# Altium PCB PCB2.PcbDoc
Units mil, origin at the board's own origin, x right, y up, seen from the top; angles counter-clockwise.
Board outline 6000 x 4000 mil, 2 copper layers (Top Layer, Bottom Layer); 13 components, 33 nets, 92 pads, 0 vias.
Unrouted connection lines stored in the file: 39.
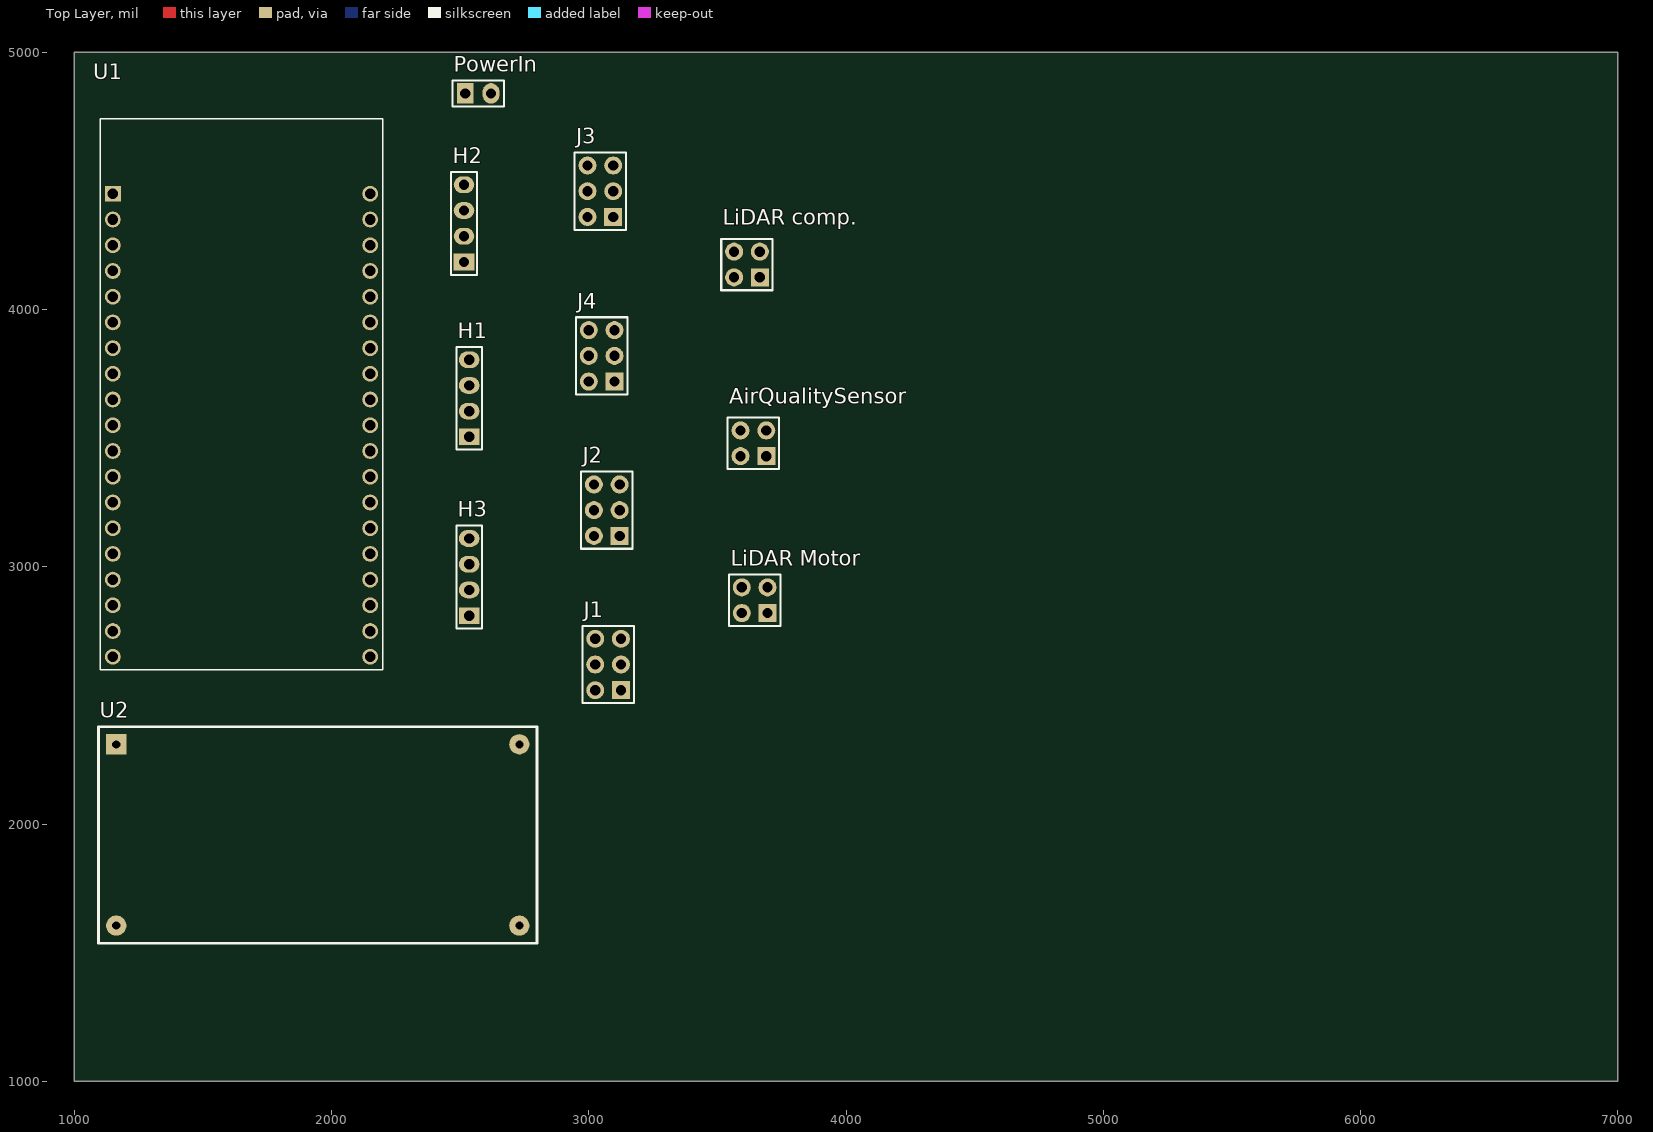
[diagram p0: Top Layer view]
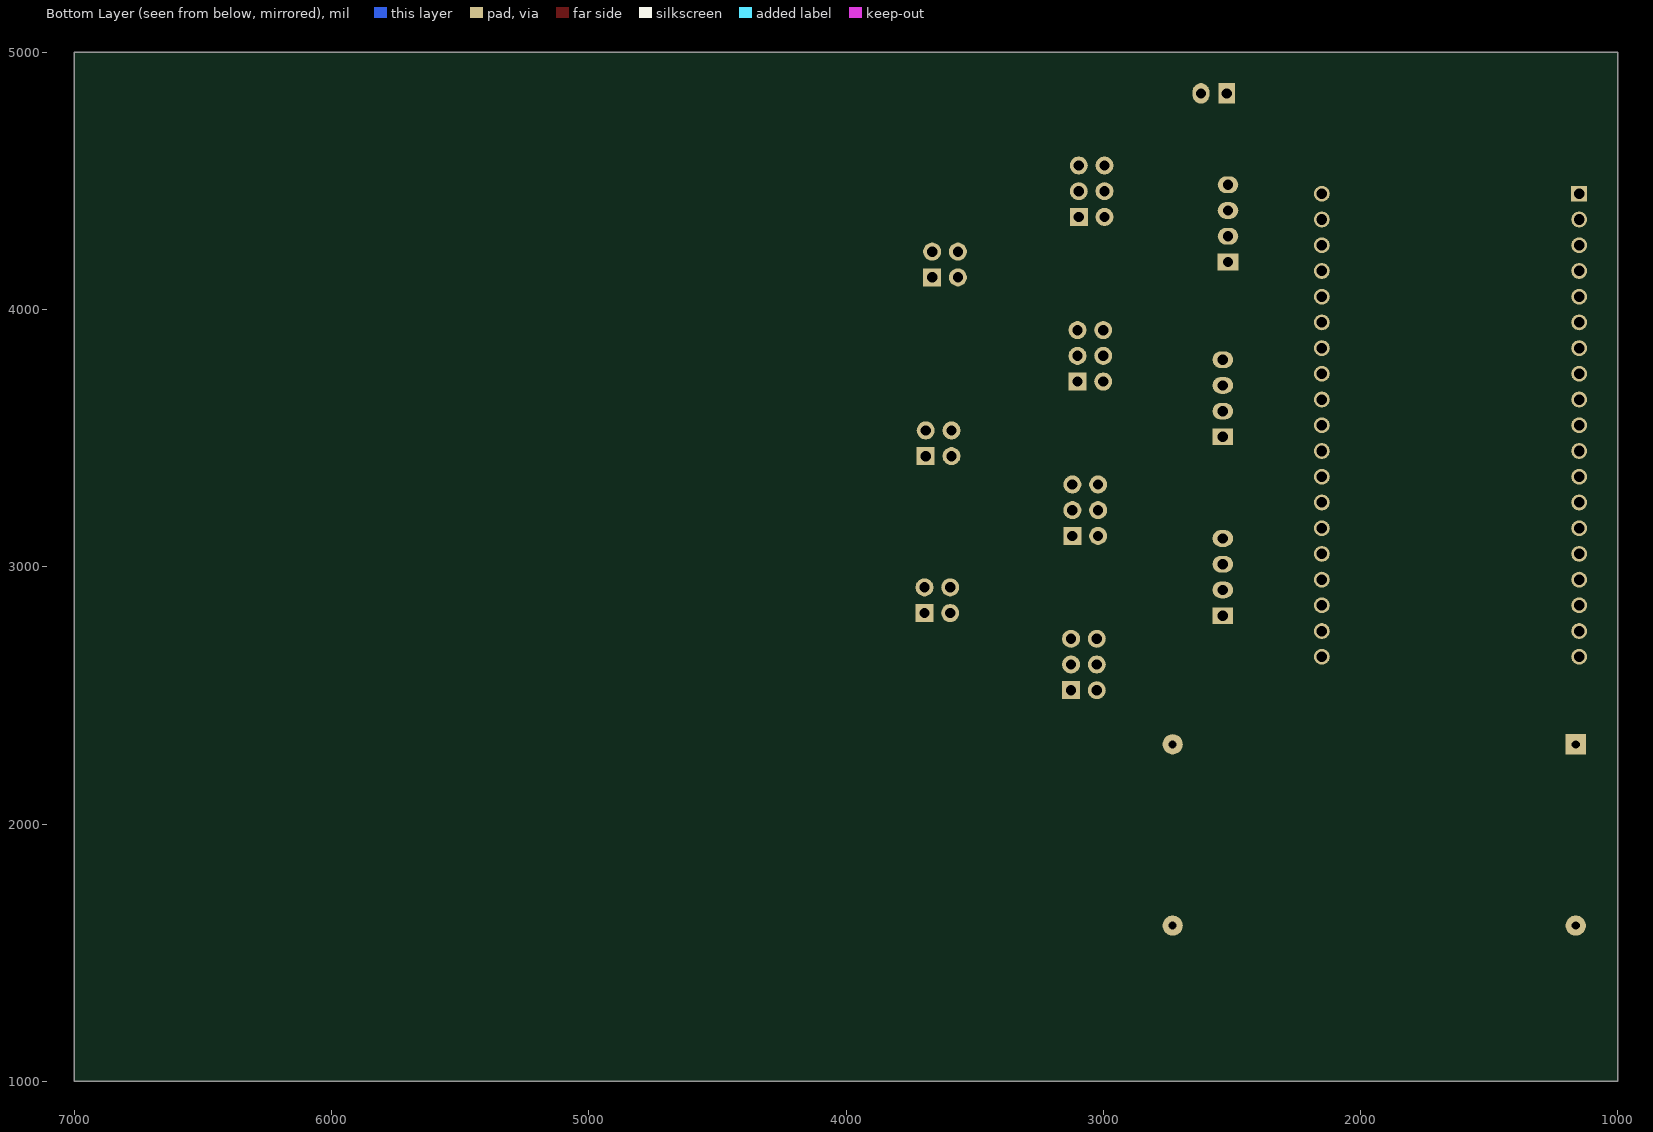
[diagram p1: Bottom Layer view, seen from below]

## Layer stack, top to bottom
Top Solder: solder mask 0.4, Solder Resist, Dk 3.5
Top Layer: signal copper 1.4
Dielectric 1: dielectric 12.6, FR-4, Dk 4.8
Bottom Layer: signal copper 1.4
Bottom Solder: solder mask 0.4, Solder Resist, Dk 3.5

## Board outline
1000,1000 7000,1000 7000,5000 1000,5000

## Design rules (kind name [scope] priority, off if disabled: settings)
Clearance [All] p1: gap=20 ignorepadtopadclearanceinfootprint=FALSE
PolygonConnect [All] p1: connectstyle=Relief reliefconductorwidth=10 reliefentries=4 polygonreliefangle="90 Angle" airgapwidth=10
RoomDefinition component_layout [InComponentClass('component_layout')] p1: confinementstyle=ConfineIn formatcopy=TRUE lockcomponents=FALSE outline 7130,35 13035,35 13035,2425 7130,2425
RoutingVias [All] p1: holewidth=28 width=50 viastyle="Through Hole" minholewidth=28 minwidth=50 maxholewidth=28 maxwidth=50
SolderMaskExpansion [All] p1: expansion=4 istentingtop=FALSE
Width [All] p1: maxlimit=50 minlimit=30 preferedwidth=40 toplayer_maxwidth=30 toplayer_prefwidth=30 minimp=50.000000 maximp=50.000000 favimp=50.000000
30 further rules are at their usual default settings.

## Components (designator, comment, footprint, x,y, rotation, side; value= is the part's Value field where it differs from the comment)
AirQualitySensor "HEADER" HDR2X2 3690,3430 r90 top
H1 "Header 4" HDR1X4 2535,3505 r90 top
H2 "Header 4" HDR1X4 2515,4185 r90 top
H3 "Header 4" HDR1X4 2535,2810 r90 top
J1 "HEADER" HDR2X3 3125,2520 r90 top
J2 "HEADER" HDR2X3 3120,3120 r90 top
J3 "HEADER" HDR2X3 3095,4360 r90 top
J4 "HEADER" HDR2X3 3100,3720 r90 top
"LiDAR comp." "HEADER" HDR2X2 3665,4125 r90 top
"LiDAR Motor" "HEADER" HDR2X2 3695,2820 r90 top
PowerIn "Header 2" HDR1X2 2520,4840 r0 top
U1 "ESP32-DEVKITC-32D" MODULE_ESP32-DEVKITC-32D 1650,3672.05 r0 top
U2 "Buck Converter" "Buck Converter" 1094.17,1536.1 r0 top

## Footprints (in the part's own frame and the unit in brackets; to place one, negate y for a bottom-side part, rotate by r counter-clockwise, add the part's x,y. Pads: shape width x height; smd on the part's side, far side on the other; paste and mask are expansions set on the pad)
"Buck Converter" [mm] "Buck Converter"
  rect 2x2 hole 0.8: 1(1.75,19.65)
  round 2 hole 0.8: 2(1.75,1.75) 3(41.55,1.75) 4(41.55,19.65)
  silkscreen extent 0,0 43.3,21.4
HDR1X2 [mil]
  rect 65x80 hole 40: 1(0,0)
  oval 65x80 hole 40: 2(100,0)
  silkscreen extent -50,-50 150,50
HDR1X4 [mil]
  rect 65x80 hole 40: 1(0,0)
  oval 65x80 hole 40: 2(100,0) 3(200,0) 4(300,0)
  silkscreen extent -50,-50 350,50
HDR2X2 [mil] "Connector; Header; 5x2 Position"
  rect 70x70 hole 40: 1(0,0)
  round 70 hole 40: 2(0,100) 3(100,0) 4(100,100)
  silkscreen extent -50,-50 150,150
HDR2X3 [mil] "Connector; Header; 5x2 Position"
  rect 70x70 hole 40: 1(0,0)
  round 70 hole 40: 2(0,100) 3(100,0) 4(100,100) 5(200,0) 6(200,100)
  silkscreen extent -50,-50 250,150
MODULE_ESP32-DEVKITC-32D [mm]
  rect 1.56x1.56 / inner round 1.56 / far side rect 1.56x1.56 hole 1.04: 1(-12.7,19.76)
  round 1.56 hole 1.04: 2(-12.7,17.22) 3(-12.7,14.68) 4(-12.7,12.14) 5(-12.7,9.6) 6(-12.7,7.06) 7(-12.7,4.52) 8(-12.7,1.98) 9(-12.7,-0.56) 10(-12.7,-3.1) 11(-12.7,-5.64) 12(-12.7,-8.18) 13(-12.7,-10.72) 14(-12.7,-13.26) 15(-12.7,-15.8) 16(-12.7,-18.34) 17(-12.7,-20.88) 18(-12.7,-23.42) 19(-12.7,-25.96) 20(12.7,19.76) 21(12.7,17.22) 22(12.7,14.68) 23(12.7,12.14) 24(12.7,9.6) 25(12.7,7.06) 26(12.7,4.52) 27(12.7,1.98) 28(12.7,-0.56) 29(12.7,-3.1) 30(12.7,-5.64) 31(12.7,-8.18) 32(12.7,-10.72) 33(12.7,-13.26) 34(12.7,-15.8) 35(12.7,-18.34) 36(12.7,-20.88) 37(12.7,-23.42) 38(12.7,-25.96)
  silkscreen extent -13.95,-27.25 13.95,27.15, body extent -13.97,-24.8 13.97,30.3, height 3.25

## Part data
AirQualitySensor "LiDAR comp." "LiDAR Motor": library part "Header 2x2", "Header, 5-Pin, Dual row", Publisher="Altium Limited", Revision="17-Jul-2002: Re-released for DXP Platform."
H1 H2 H3: "Header, 4-Pin", Manufacturer="Generic Components", Class=Connector
J1 J2 J3 J4: library part "Header 2x3", "Header, 5-Pin, Dual row", Publisher="Altium Limited", Revision="17-Jul-2002: Re-released for DXP Platform."
PowerIn: "Header, 2-Pin", Manufacturer="Generic Components", Class=Connector
U1: "WiFi Development Tools (802.11) ESP32 General Development Kit, ESP32-WROOM-32D on the board", Package=None, Availability="In Stock", Check_prices=https://www.snapeda.com/parts/ESP32-DEVKITC-32D/Espressif+Systems/view-part/?ref=eda, MF="Espressif Systems", MP=ESP32-DEVKITC-32D, Price=None, Purchase-URL=https://pricing.snapeda.com/search/part/ESP32-DEVKITC-32D/?ref=eda, SnapEDA_Link=https://www.snapeda.com/parts/ESP32-DEVKITC-32D/Espressif+Systems/view-part/?ref=snap
U2: "Buck Convertor"

## Nets (pads, with @x,y where several pads share a name; then routed paths per layer and width w, separated by ;. In a path a pad name is that pad's centre, name@x,y a point inside that pad or via, vN(x,y) a via of type N, cw(c..) or ccw(c..) an arc to the next point about the centre after c; other vN are vias at no path point)
+3.3: H1.3 J1.1 J3.4 J4.4 U1.1
+5: "LiDAR comp..1" "LiDAR Motor.1" AirQualitySensor.2
+10.8: U1.19
+12: H2.2 H3.2 U2.4
Echo: H1.2
GND: "LiDAR comp..3" "LiDAR Motor.3" AirQualitySensor.4 H1.4 H2.1 H3.1 J1.2 J2.2 J3.6 J4.6 PowerIn.1 U1.20 U2.2 U2.3
Left_motor_1: J1.3 U1.28
Left_motor_2: J1.5 U1.29
LeftEncoder1: J3.3 U1.27
LeftEncoder2: J3.5 U1.31
LME1: J1.4
LME2: J1.6
motor_PWM_lidar: "LiDAR Motor.4" U1.11
MotorEnable: U1.5
MotorEnable2: U1.6
MotorEnable3: U1.7
MotorEnable4: U1.8
NetH2_3: H2.3 J4.2
NetH2_4: H2.4 J4.1
NetH3_3: H3.3 J3.2
NetH3_4: H3.4 J3.1
NetPowerIn_2: PowerIn.2 U2.1
Right_motor_1: J2.3 U1.32
Right_motor_2: J2.5 U1.35
RightEncoder1: J4.3 U1.30
RightEncoder2: J4.5 U1.34
RME1: J2.4
RME2: J2.6
Rx-LiDAR: "LiDAR comp..2" U1.23
SCL_airqual: AirQualitySensor.1 U1.22
SDA_airqual: AirQualitySensor.3 U1.25
Trig: H1.1
Tx-LiDAR: "LiDAR comp..4" U1.24
pads on no net: "LiDAR Motor.2" J2.1 U1.2 U1.3 U1.4 U1.9 U1.10 U1.12 U1.13 U1.14 U1.15 U1.16 U1.17 U1.18 U1.21 U1.26 U1.33 U1.36 U1.37 U1.38